# EAGLE board watch dip (EAGLE 6.5.0)
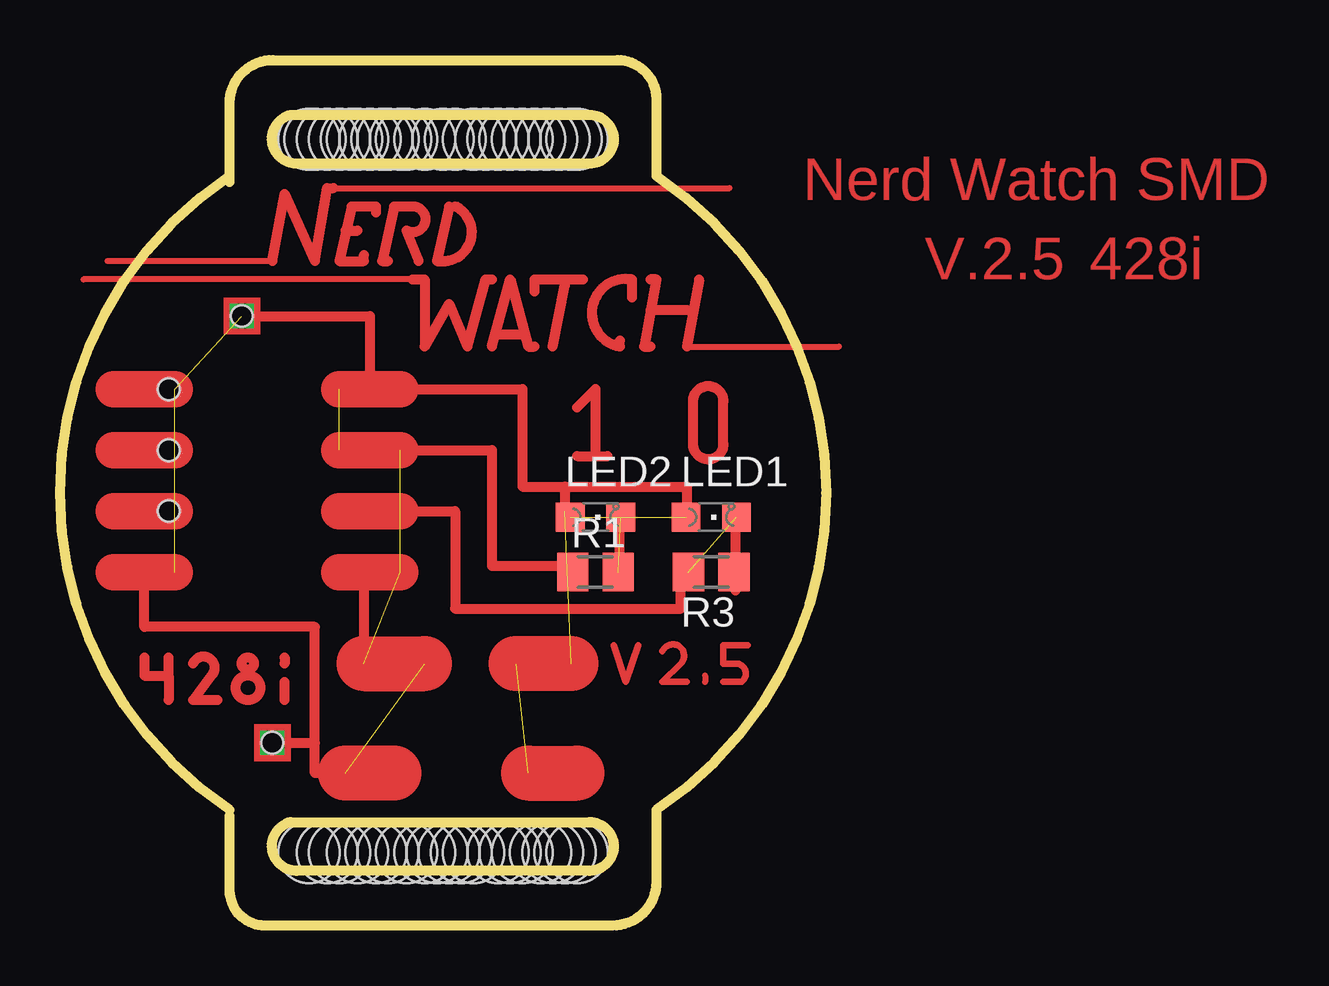
[diagram p0: board, top side]
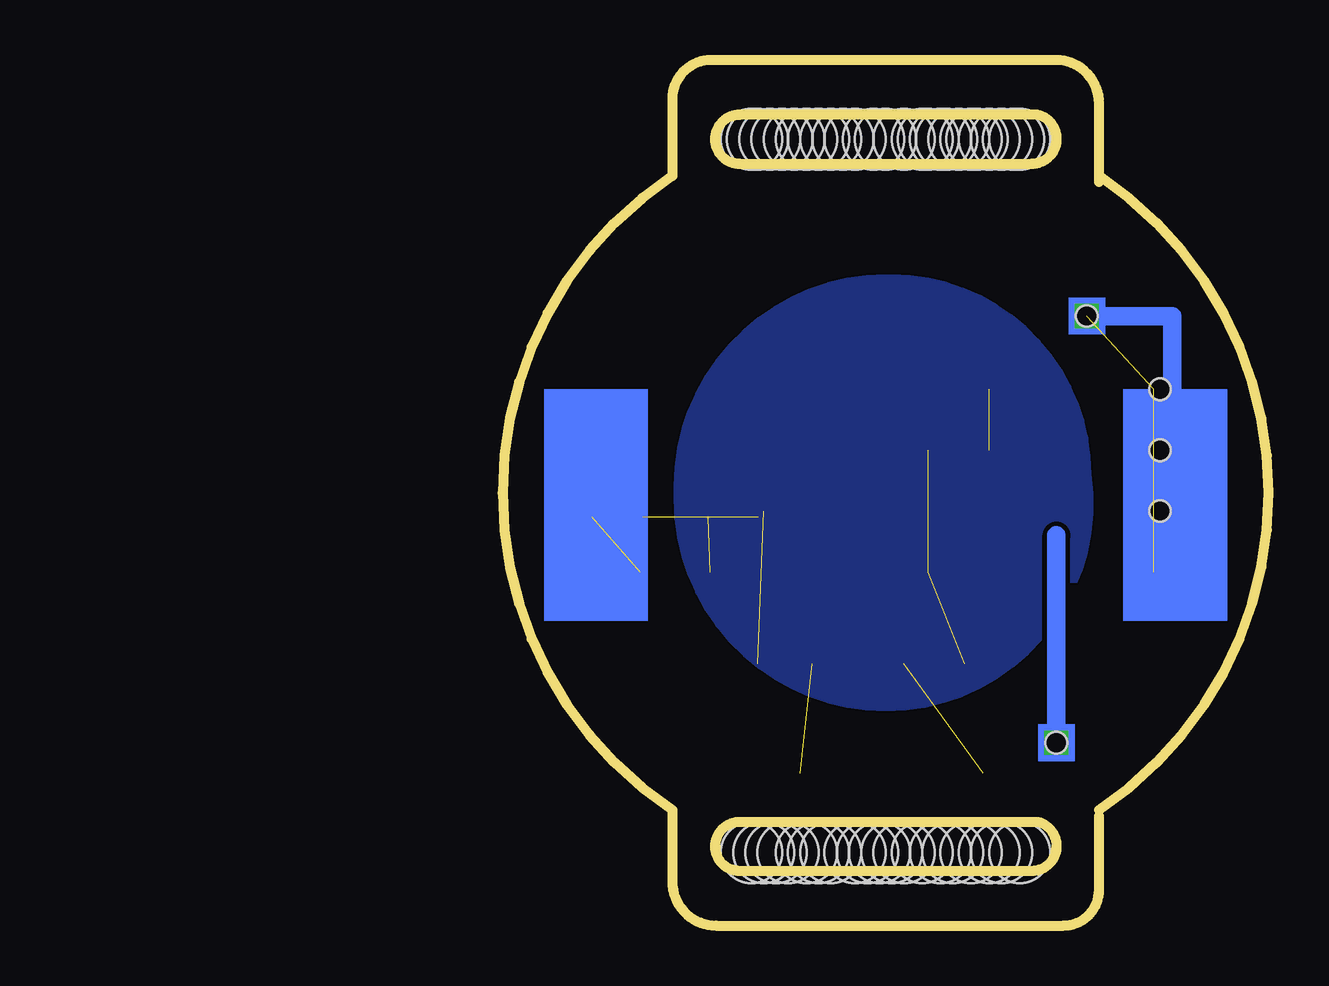
[diagram p1: board, bottom side, seen from below]

Size 31.92 x 36.07 mm. Coordinates in mm from the lower left corner, seen from the top.
Outline: 7.07,30.99 7.07,31.24
Outline: 7.07,31.24 7.07,34.27 arc-90 8.86,36.07 23.22,36.07 arc-90 24.85,34.44 24.85,31.24 arc-113 24.85,4.83 24.85,1.83 arc-90 23.02,0 8.55,0 arc-90 7.07,1.48 7.07,4.57
Outline: 7.07,4.83 arc-113 7.07,31.24
Outline: 9.61,33.78 22.05,33.78 arc-180 22.05,31.75 9.86,31.75 arc-166 9.61,33.78
Outline: 9.61,4.32 22.05,4.32 arc-180 22.05,2.29 9.86,2.29 arc-166 9.61,4.32
Copper layers (1*16): Top 0.035mm / dielectric 1.5mm / Bottom 0.035mm
Design rules "default": minimum track width 10mil, minimum drill 24mil, track to track 8mil, track to pad 8mil, pad to pad 8mil, via to via 8mil, smd to smd 8mil, copper to edge 40mil, drill to drill 8mil, minimum pad ring 10mil, minimum via ring 8mil, stop-mask expansion 4mil, vias tented up to drill 0mil, thermal gap 10mil
Holes 0.89 mm at 4.53,22.35 4.53,19.81 4.53,17.27 7.58,25.4 8.85,7.62
Holes 2.54 mm at 10.37,3.05 21.55,3.05 12.4,3.05 14.43,3.05 16.21,3.05 18.24,3.05 20.02,3.05 21.55,32.77 20.28,32.77 18.75,32.77 17.23,32.77 15.2,32.77 13.42,32.77 12.15,32.77 10.37,32.77 11.13,3.05 11.64,3.05 13.16,3.05 13.67,3.05 15.2,3.05 15.7,3.05 17.23,3.05 16.72,3.05 18.75,3.05 19.26,3.05 20.53,3.05 21.04,3.05 10.62,32.77 11.13,32.77 11.64,32.77 12.4,32.77 12.91,32.77 13.67,32.77 14.18,32.77 14.43,32.77 15.96,32.77 16.47,32.77 17.74,32.77 18.24,32.77 19.26,32.77 19.77,32.77 21.29,32.77 20.78,32.77

## Footprints (pad centres in the part's own frame; a part is rotated, then mirrored left to right if it is on the bottom)
CHIPLED_0805 = smd 1.2 x 1.2: A 0,-1.05; C 0,1.05
M0805 = smd 1.3 x 1.6: 1 -0.95,0; 2 0.95,0

## Placement (x,y rotation side)
LED1  [CHIPLED_0805]  27.13,17.02 270 top
LED2  [CHIPLED_0805]  22.31,17.02 270 top
R1  [M0805]  22.31,14.73 0 top
R3  [M0805]  27.13,14.73 180 top

## Library data of the parts
LED1 LED2 = led
R1 R3 = resistor

## Nets
3.3V: LED1.A LED2.A
N$1: LED2.C R1.2
N$2: R3.1
N$4: R1.1
N$6: LED1.C R3.2

## Tracks (layer width: path | path; a pad name or v marks a point on that pad's centre or on a via)
3.3V  (1 unrouted)
N$1  (1 unrouted)
N$3
  Top 0.406: 21.55,21.59 22.31,22.35 22.31,19.56
N$5
  Bottom 0.762: 4.02,21.84 4.02,25.4 7.83,25.4
N$6  (1 unrouted)
N$7
  Top 0.406: 23.32,14.73 23.32,17.27
N$8
  Top 0.406: 28.15,13.97 28.15,17.02
N$9
  Top 0.406: 12.91,19.81 17.99,19.81 17.99,14.99 20.78,14.99
N$10
  Top 0.406: 12.91,17.27 16.47,17.27 16.47,13.21 25.86,13.21
N$11
  Top 0.406: 12.66,14.22 12.66,10.92
N$12
  Bottom 0.762: 8.85,7.62 8.85,16.26
N$13
  pour Bottom: 7.58,18.8 arc-90 15.7,26.92 15.96,26.92 arc-90 24.59,18.29 24.59,17.78 arc-90 15.96,9.14 arc-98
N$15  (via drill 0.6)
  Top 0.406: 11.89,6.35 10.62,6.35 10.62,7.62 | 10.62,7.62 10.62,12.45 3.51,12.45 3.51,14.73 | v8.85,7.62 10.62,7.62
N$16
  Top 0.406: 26.37,21.84 26.37,20.07 arc180 27.64,20.07 27.64,21.84 arc180 26.37,21.84
N$17
  Top 0.406: 21.55,19.56 22.82,19.56
N$18
  Top 0.406: 3.51,11.18 3.51,10.41 4.53,10.41 | 4.53,10.41 4.53,11.18 | 4.53,10.41 4.53,9.4
N$19
  Top 0.406: 6.56,9.4 5.54,9.4 6.31,10.41 arc203 5.54,10.92
N$20
  Top 0.406: 9.35,9.4 9.35,10.16
N$21
  Top 0.406: 9.35,11.18 9.35,10.92
N$22
  Top 0.279: 28.66,11.68 27.64,11.68 27.64,10.92 28.15,10.92 arc-143 28.4,10.16 27.64,10.16
N$23  (via drill 0.6)  (11 unrouted)
  Top 0.406: v7.58,25.4 12.91,25.4 12.91,22.35 | 14.18,22.35 19.26,22.35 19.26,18.29 21.04,18.29 | 21.04,18.29 26.12,18.29 26.12,17.27 | 21.04,18.29 21.04,17.27
  Top 1.524: 4.78,22.35 2.24,22.35 | 4.78,19.81 2.24,19.81 | 4.78,17.27 2.24,17.27 | 4.78,14.73 2.24,14.73 | 14.18,22.35 12.91,22.35 11.64,22.35 | 14.18,19.81 11.64,19.81 | 14.18,17.27 11.64,17.27 | 14.18,14.73 11.64,14.73
  Top 2.286: 21.29,10.92 19.01,10.92 | 19.51,6.35 21.55,6.35 | 13.93,6.35 11.89,6.35 | 12.66,10.92 15.2,10.92
N$24
  Top 0.406: 25.86,13.21 25.86,14.73
N$25
  Top 0.254: 14.69,26.92 0.97,26.92
N$26
  Top 0.279: 23.07,11.68 23.58,10.16 24.09,11.68
N$27
  Top 0.279: 26.12,10.16 25.1,10.16 25.86,10.92 arc203 25.1,11.43
N$28
  Top 0.254: 26.88,10.41 26.88,10.16
N$29
  Top 0.254: 8.85,27.69 1.99,27.69
  Top 0.406: 8.85,27.69 9.35,30.48 10.62,27.69 11.13,30.73 11.39,30.73
N$30
  Top 0.254: 11.39,30.73 27.9,30.73
N$33
  Top 0.406: 12.66,27.94 12.66,27.69 11.64,27.69 12.15,29.97 13.16,29.97 13.16,29.72
N$34
  Top 0.406: 11.89,28.96 12.4,28.96
N$35
  Top 0.406: 14.94,27.69 14.43,28.96 arc208 14.69,29.97 13.93,29.97 13.42,27.69 13.67,27.69
N$36
  Top 0.406: 16.21,29.97 15.7,27.69 15.96,27.69 arc155 16.47,29.97
N$37
  Top 0.406: 14.69,26.92 15.2,26.92 15.2,24.13 16.21,25.91 16.97,24.13 17.74,26.92 17.99,26.92
N$38
  Top 0.406: 17.99,24.13 18.75,26.92 19.51,24.13 19.77,24.13
N$39
  Top 0.406: 18.24,24.64 19.26,24.64
N$40
  Top 0.406: 20.53,24.13 21.04,26.67
N$41
  Top 0.406: 21.8,26.92 19.77,26.92 19.77,26.42
N$42
  Top 0.406: 23.32,24.38 23.32,24.13 arc-180 23.83,26.92 23.83,26.16
N$43
  Top 0.406: 24.59,26.92 24.85,26.92 24.34,24.13 24.59,24.13
N$44
  Top 0.406: 24.59,25.65 26.12,25.65
N$45
  Top 0.254: 26.12,24.13 32.47,24.13
  Top 0.406: 26.63,26.92 26.12,24.13
(copper drawn outside any net)
  shapes: Bottom area x4, Top area x2, Top circle x2

## Text on the board
Top: Nerd Watch SMD | V.2.5 | 428i